# Altium PCB Spektrum Adapter SMD.PcbDoc
Units mil, origin at the board's own origin, x right, y up, seen from the top; angles counter-clockwise.
Board outline 695 x 340 mil, 2 copper layers (Top Layer, Bottom Layer); 6 components, 5 nets, 22 pads, 0 vias.
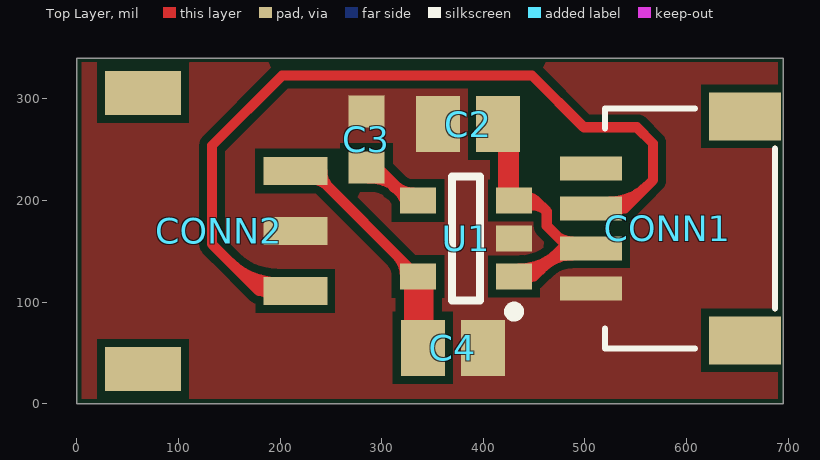
[diagram p0: Top Layer view]
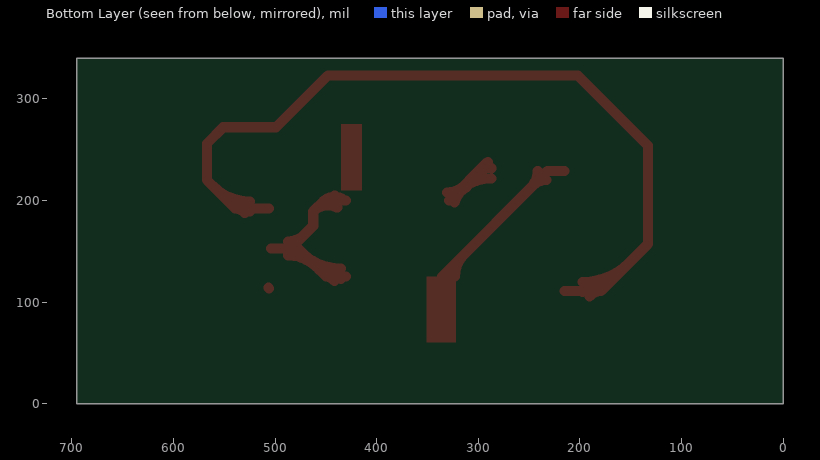
[diagram p1: Bottom Layer view, seen from below]
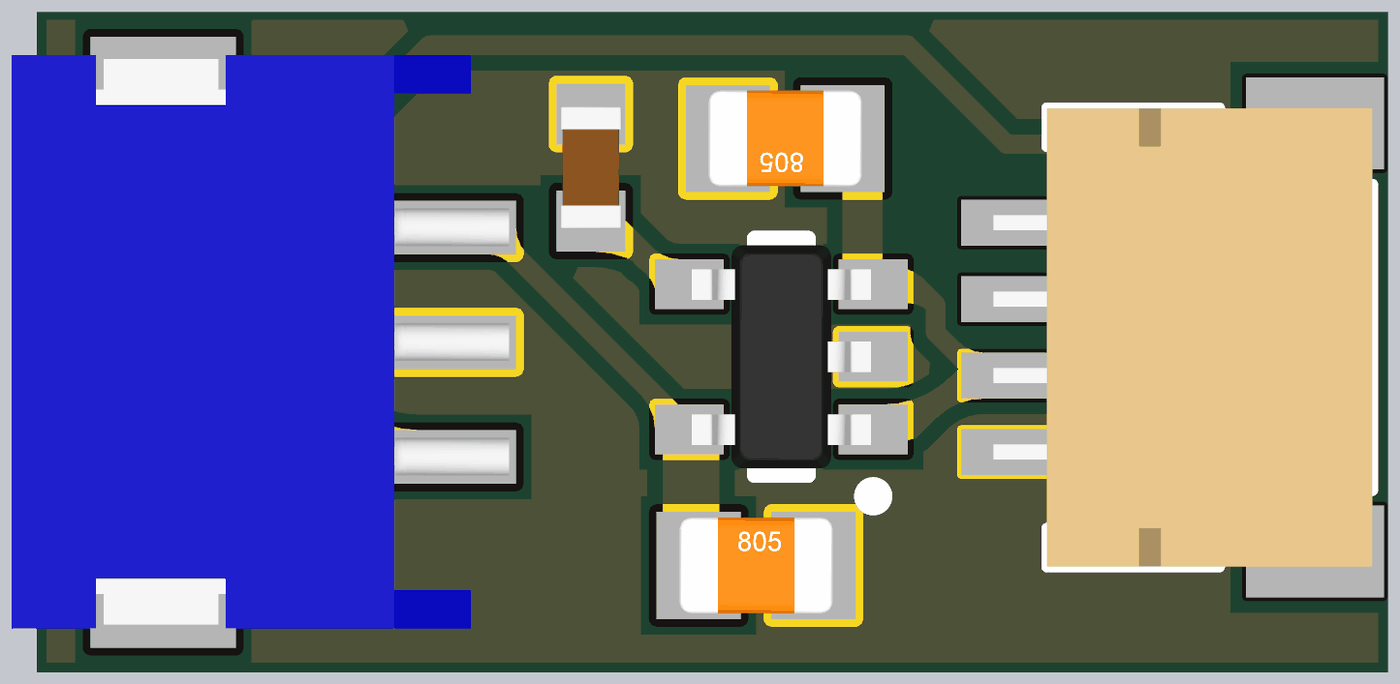
[diagram p2: 3D render of the assembled board from above, using the file's embedded part models]

## Layer stack, top to bottom
Top Layer: signal copper 1.4
Dielectric: dielectric 12.6, FR-4, Dk 4.8
Bottom Layer: signal copper 1.4

## Board outline
0,0 695,0 695,340 0,340

## Design rules (kind name [scope] priority, off if disabled: settings)
Clearance [All] p1: gap=8
MinimumSolderMaskSliver [All] p1: minsoldermaskwidth=3
PolygonConnect [All] p1: connectstyle=Direct reliefconductorwidth=10 reliefentries=4 polygonreliefangle="90 Angle"
RoutingVias [All] p1: holewidth=28 width=50 viastyle="Through Hole" minholewidth=28 minwidth=50 maxholewidth=28 maxwidth=50
SilkscreenOverComponentPads [All] p1: minsilkscreentomaskgap=8
SolderMaskExpansion [All] p1: expansion=4
Width [All] p1: maxlimit=20 minlimit=10 preferedwidth=10 minimp=50.000000 maximp=50.000000 favimp=50.000000
26 further rules are at their usual default settings.

## Components (designator, comment, footprint, x,y, rotation, side; value= is the part's Value field where it differs from the comment)
C2 "Cap805" CAP805L 385,275 r180 top
C3 "Cap603" CAP603L 285,260 r90 top
C4 "Cap805" CAP805L 370,55 r0 top
CONN1 "USART" "JST SH 4 Pin Side Entry" 687,172.5 r90 top locked
CONN2 "JST ZH 3 Pin" "JST ZH SMD 3 PIN SIDE ENTRY" 65,305.83 r90 top
U1 "LP2985-3.3" SOT23-5L 383,162.5 r180 top

## Footprints (in the part's own frame and the unit in brackets; to place one, negate y for a bottom-side part, rotate by r counter-clockwise, add the part's x,y. Pads: shape width x height; smd on the part's side, far side on the other; paste and mask are expansions set on the pad)
CAP603L [mm] "Chip Capacitor, Body 1.6x0.8mm, IPC High Density"
  rect 0.8x0.9 smd: 1(-0.7,0) 2(0.7,0)
  body extent -0.8,-0.4 0.8,0.4, height 0.77
CAP805L [mm] "Chip Capacitor, Body 2.0x1.3mm, IPC High Density"
  rect 1.1x1.4 smd: 1(-0.75,0) 2(0.75,0)
  body extent -1,-0.62 1,0.63, height 0.78
"JST SH 4 Pin Side Entry" [mm] "SM04B-SRSS-TB"
  rect 1.2x1.8 smd paste+0 mask+0.051: 0(-2.8,0.75) 0(2.8,0.75)
  rect 0.6x1.55 smd paste+0 mask+0.051: 1(-1.5,4.6) 2(-0.5,4.6) 3(0.5,4.6) 4(1.5,4.6)
  silkscreen extent -3,0 3,4.25, body extent -3,0 3,4.95, height 2.92
"JST ZH SMD 3 PIN SIDE ENTRY" [mm] "S3B-ZR-SM4A-TF(LF)(SN)(P) - Spektrum Sat Connector"
  rect 1.1x1.9 smd: 0(-6.9,0) 0(0,0)
  rect 0.7x1.6 smd: 1(-1.95,-3.81) 2(-3.45,-3.81) 3(-4.95,-3.81)
  body extent -7.2,-4.52 0.3,1.98, height 3.7
SOT23-5L [mm] "SOT23, 5-Leads, Body 2.9x1.6mm, Pitch 0.95mm, Lead Span 2.8mm, IPC High Density"
  rect 0.9x0.65 smd mask+0.076: 1(-1.2,0.95) 2(-1.2,0) 3(-1.2,-0.95) 4(1.2,-0.95) 5(1.2,0.95)
  silkscreen extent -1.33,-1.55 0.35,1.95, body extent -1.17,-1.46 1.17,1.46, height 0.97

## Part data
C2 C3 C4: "Capacitor SMD"
CONN1: library part "JST-SH 4-pin Side Entry Socket", "JST-SH 4-pin Side Entry Socket"
CONN2: library part "JST ZH 3-pin Side Entry Socket", "JST ZH 1.5mm 3-pin Side Entry Socket"
U1: "3.3V 150mA LDO Regulator"

## Nets (pads, with @x,y where several pads share a name; then routed paths per layer and width w, separated by ;. In a path a pad name is that pad's centre, name@x,y a point inside that pad or via, vN(x,y) a via of type N, cw(c..) or ccw(c..) an arc to the next point about the centre after c; other vN are vias at no path point)
GND: C2.2 C3.2 C4.2 CONN1.1 CONN2.2 U1.2 | length 0.8
  Top Layer w10: CONN1.1 CONN1.1@506.45,114
NetC2_1: C2.1 CONN1.2 U1.1 U1.3 | length 420.7
  Top Layer w10: U1.1 449.9,125.1 ; U1.3 451.74,199.9 ; U1.3@434.16,201.86 cw(c441.43,187.7) 452.68,198.96 ; U1.1@435.17,122.89 ccw(c435.17,153.15) 456.56,131.75 ; U1.1@435.17,132.89 ccw(c435.17,187.29) 473.63,148.83 ; U1.3@438.73,192.97 cw(c448.01,174.88) 462.39,189.26 ; U1.3@441.17,194.93 cw(c451.74,186.18) 451.74,199.9 ; U1.3@441.17,204.87 ccw(c451.74,213.62) 451.74,199.9 ; U1.1@441.61,120.71 cw(c449.9,115.07) 449.9,125.1 ; U1.1@441.61,129.48 ccw(c449.9,135.13) 449.9,125.1 ; 459.22,134.41 cw(c487.2,106.44) CONN1.2@487.2,146 ; 471.07,166.31 ccw(c487.2,182.43) CONN1.2@487.2,159.63 ; CONN1.2@477.43,159.94 cw(c470.31,152.82) CONN1.2@480.39,152.82 ; CONN1.2@482.56,152.82 CONN1.2@503.9,152.82 ; 449.9,125.1 477.62,152.82 CONN1.2@503.9,152.82 ; 451.74,199.9 462.39,189.25 ; 462.39,189.25 462.39,174.99 484.56,152.82 CONN1.2@503.9,152.82
NetC3_1: C3.1 U1.4 | length 169
  Top Layer w10: C3.1@286.97,221.69 cw(c286.97,173.94) U1.4@320.73,207.71 ; C3.1@286.97,231.69 cw(c286.97,208.08) 303.66,224.78 ; C3.1@290.5,237.94 U1.4@328.54,199.9 ; 311.82,212.85 cw(c299.49,191.5) U1.4@323.3,197.88 ; 313.61,214.83 ccw(c330.83,232.06) U1.4@330.83,207.7 ; U1.4@318.96,208.73 ccw(c325.46,219.97) U1.4@328.82,207.43 ; U1.4@319.15,209.29 cw(c309.76,199.9) U1.4@323.04,199.9
NetC4_1: C4.1 CONN2.1 U1.5 | length 220.7
  Top Layer w10: CONN2.1 231.54,229.06 335.49,125.1 U1.5 ; CONN2.1@232.72,220.28 cw(c232.72,201.93) 245.69,214.9 ; CONN2.1@241.5,229.06 ccw(c265.54,229.06) 248.54,212.05 ; 314.23,146.36 cw(c292.97,125.1) U1.5@323.04,125.1
NetCONN1_3: CONN1.3 CONN2.3 | length 990.1
  Top Layer w10: 151.18,138.82 ccw(c197.28,184.93) CONN2.3@197.28,119.72 ; 168.25,121.75 ccw(c197.28,150.79) CONN2.3@197.28,109.72 ; CONN2.3@190.42,105.47 ccw(c179.06,96.41) 179.06,110.94 ; CONN2.3@190.42,116.42 cw(c179.06,125.48) 179.06,110.94 ; CONN2.3 179.06,110.94 ; CONN1.3 539.18,192.18 ; CONN1.3@524.6,189 ccw(c524.6,216.51) 544.06,197.06 ; CONN1.3@524.6,199 ccw(c524.6,250.65) 561.13,214.13 ; CONN1.3@529.82,187.81 cw(c539.18,179.97) 539.18,192.19 ; CONN1.3@529.82,196.56 ccw(c539.18,204.4) 539.18,192.18 ; 179.06,110.94 133,157 133,254 202,323 448,323 499,272 551,272 567,256 567,220 539.18,192.18
pads on no net: CONN1.0 CONN1.4 CONN2.0

## Polygon pours and split planes (outlines as drawn)
GND on Top Layer "Ground Layer-GND" (solid, remove dead copper, pour order 1000): 5,5 690,5 690,336 5,336

## Other copper
Top Layer:
  rectangle net NetC4_1: 322,60 351,125.1
  rectangle net NetC2_1: 414.53,209.9 435,275

## Silkscreen, mask and mechanical layers (free items; w line width, h text height)
Board Dimensions:
  the board outline again, w1